# Altium PCB 海关全向控制器主控板电路V2.PcbDoc (part 1 of 3)
Units mil, origin at the board's own origin, x right, y up, seen from the top; angles counter-clockwise.
Board outline 7874.02 x 2362.2 mil, 2 copper layers (Top Layer, Bottom Layer), stack 42.17 mil thick; 192 components, 121 nets, 551 pads, 141 vias.
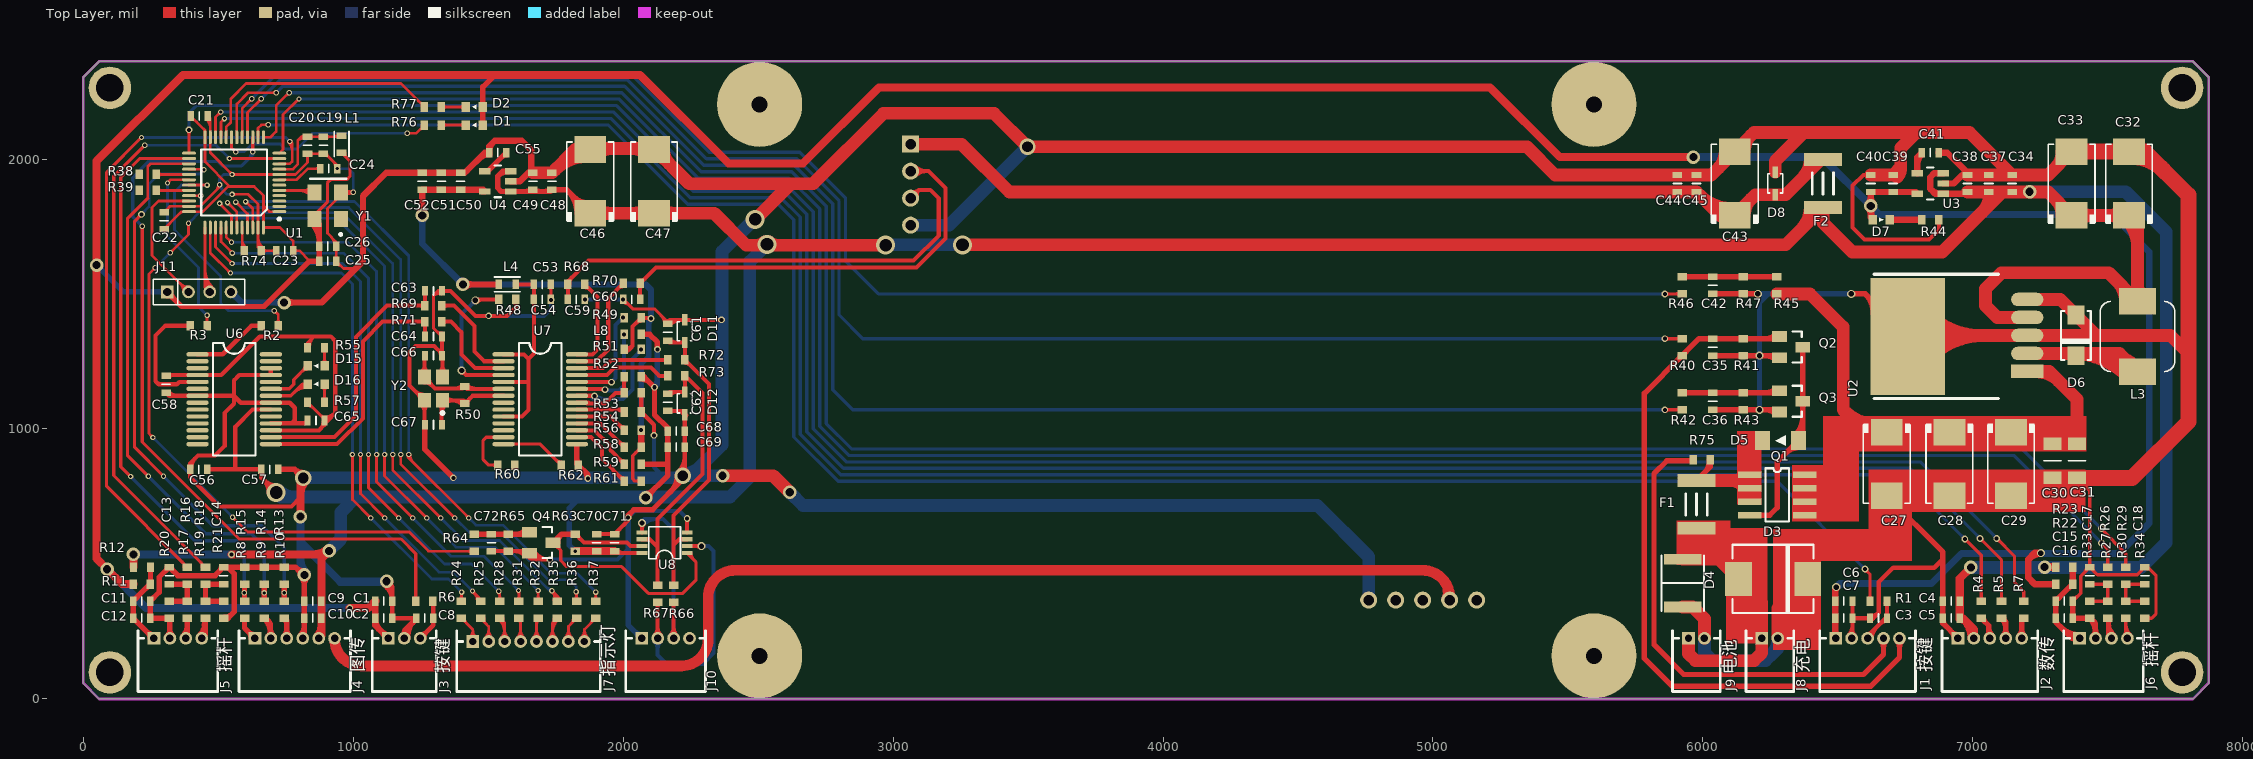
[diagram p0: Top Layer view]
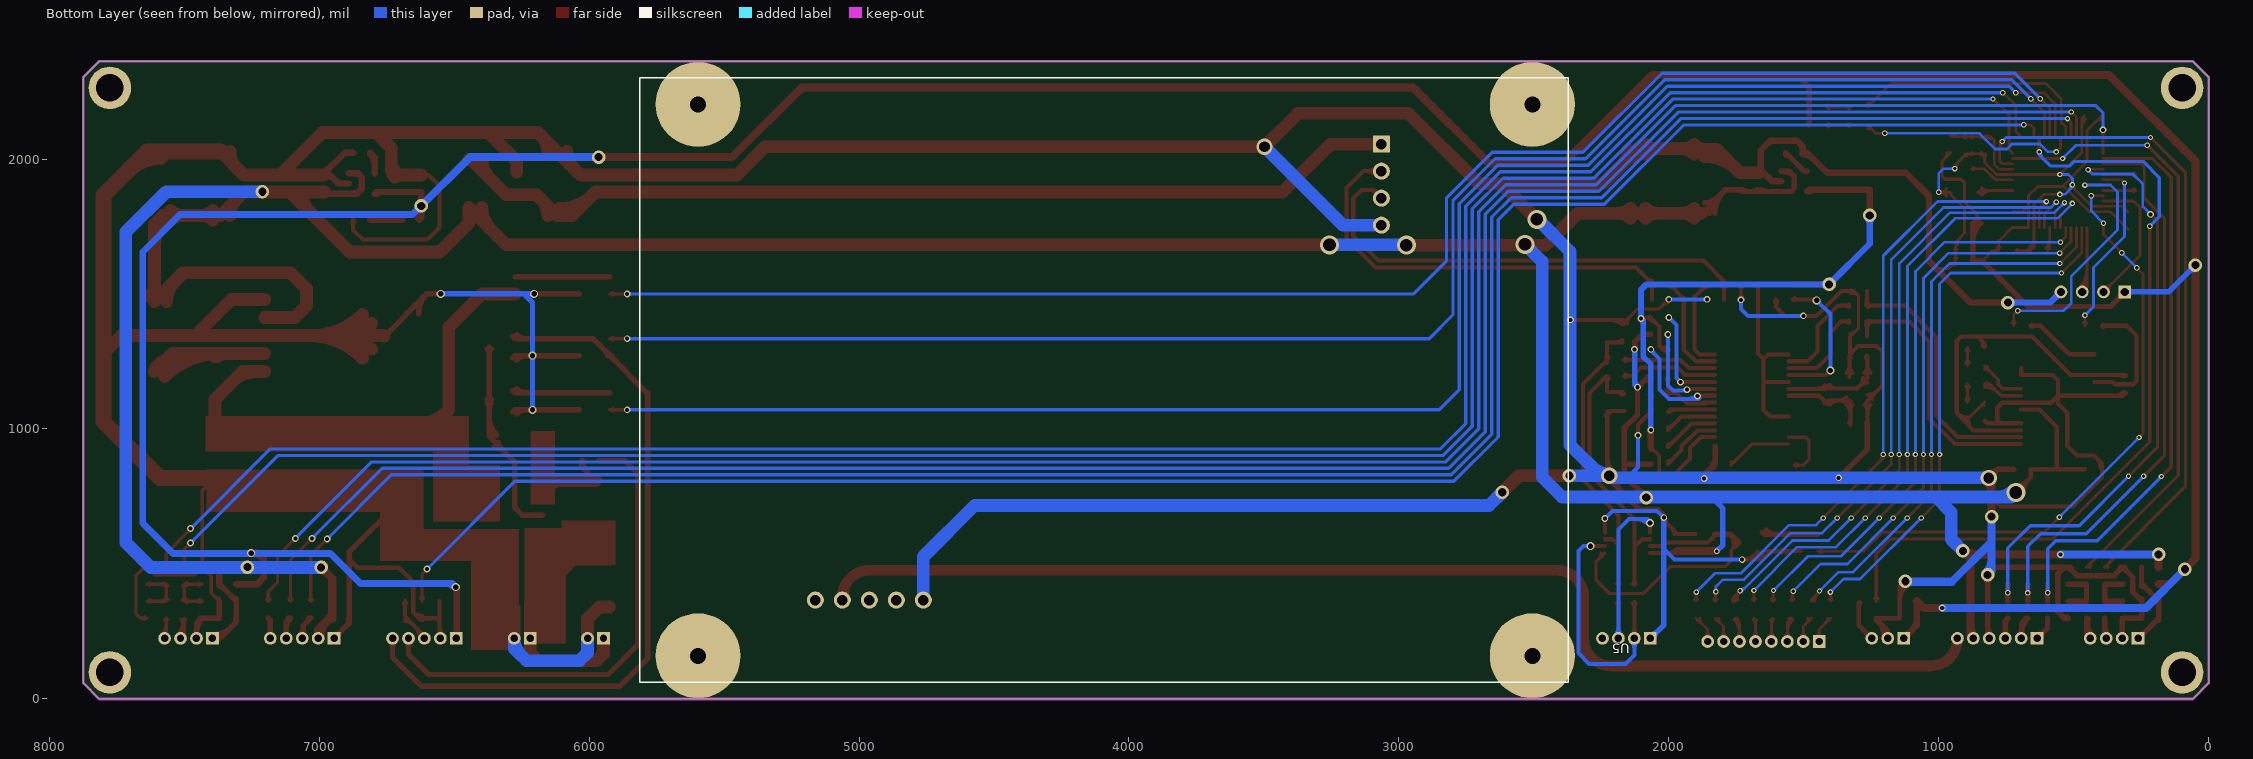
[diagram p1: Bottom Layer view, seen from below]
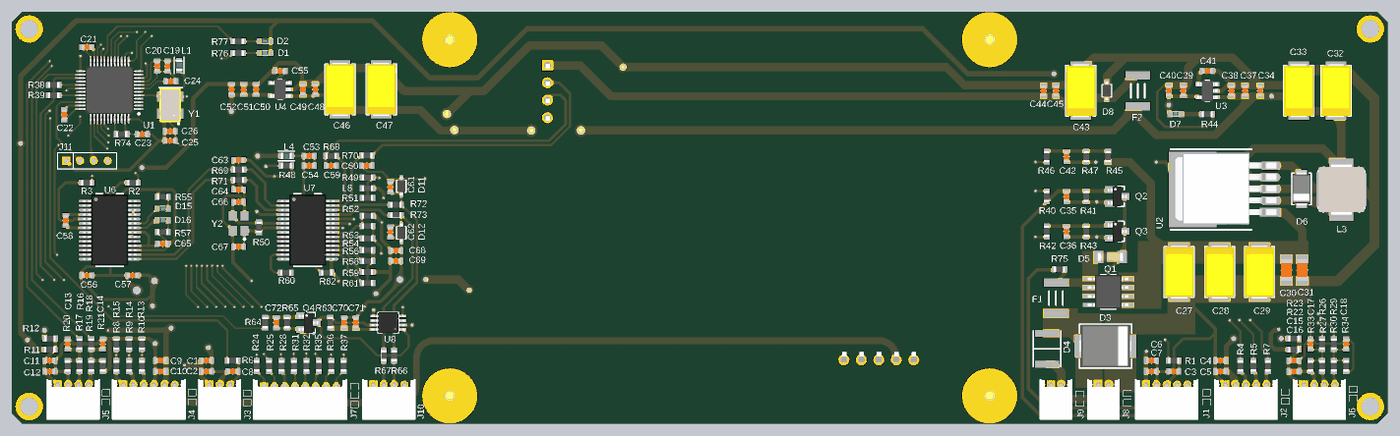
[diagram p4: 3D render of the assembled board from above, using the file's embedded part models]

## Layer stack, top to bottom
Top Solder: solder mask 0.4, Solder Resist, Dk 3.5
Top Layer: signal copper 1.4
Dielectric 1: dielectric 39.3701, FR-4, Dk 4.8
Bottom Layer: signal copper 1.4
Bottom Solder: solder mask 0.4, Solder Resist, Dk 3.5

## Board outline
0,59.06 0,2303.15 59.06,2362.2 7814.96,2362.2 7874.02,2303.15 7874.02,59.06 7814.96,0 59.06,0

## Design rules (kind name [scope] priority, off if disabled: settings)
Clearance [All] p1: gap=6
ComponentClearance [All] p1: gap=0 collisioncheckmode=3 verticalgap=0 showdistances=FALSE
DiffPairsRouting [All] p1: maxlimit=10 minlimit=10 mostfreqgap=10 toplayer_minwidth=15 toplayer_maxwidth=15 toplayer_prefwidth=15 bottomlayer_minwidth=15 bottomlayer_maxwidth=15 bottomlayer_prefwidth=15 maxuncoupledlength=500
Height [All] p1: minheight=0 maxheight=2000 prefheight=500
HoleSize [All] p1: absolutevalues=TRUE maxlimit=200 minlimit=1 maxpercent=80.000 minpercent=20.000
HoleToHoleClearance [All] p1: gap=6 allowstackedmicrovias=TRUE
MatchedLengths [InNetClass(USB)] p1: tolerance=1000 checknetsindiffpair=TRUE checkdiffpairvsdiffpair=TRUE checkothers=TRUE
MinimumSolderMaskSliver [All] p1: minsoldermaskwidth=0
PlaneConnect [All] p1: planeconnectstyle=Direct reliefexpansion=20 reliefentries=4 reliefconductorwidth=10 reliefairgap=10
PolygonConnect [All] p1: connectstyle=Direct reliefconductorwidth=10 reliefentries=4 polygonreliefangle="90 Angle" airgapwidth=10
RoutingVias [All] p1: holewidth=28 width=50 viastyle="Through Hole" minholewidth=8 minwidth=12 maxholewidth=200 maxwidth=300
SilkToSilkClearance [All] p1: silktosilkclearance=0
SilkToSolderMaskClearance [IsPad] p1: minsilkscreentomaskgap=0 clearancetoexposedcopper=TRUE
SolderMaskExpansion [All] p1: expansion=4
Width [All] p1: maxlimit=157.48 minlimit=10 preferedwidth=10
20 further rules are at their usual default settings.

## Classes and differential pairs
component class Designator: C43 C44 C45 C46 C47 C48 C49 C50 C51 C52 C53 C54 C55 C56 C57 C58 C59 C60 C61 C62 C63 C64 C65 C66 C67 C68 C69 C70 C71 C72 D8 D11 D12 D15 D16 F2 J10 L4 L8 Q4 R48 R49 R50 R51 R52 R53 R54 R55 R56 R57 R58 R59 R60 R61 R62 R63 R64 R65 R66 R67 R68 R69 R70 R71 R72 R73 U4 U5 U6 U7 U8 Y2
component class 海关全向控制器主控板电路V2_系统管理: C1 C2 C3 C4 C5 C6 C7 C8 C9 C10 C11 C12 C13 C14 C15 C16 C17 C18 J1 J2 J3 J4 J5 J6 J7 R1 R2 R3 R4 R5 R6 R7 R8 R9 R10 R11 R12 R13 R14 R15 R16 R17 R18 R19 R20 R21 R22 R23 R24 R25 R26 R27 R28 R29 R30 R31 R32 R33 R34 R35 R36 R37
differential pair USB: +USB_P -USB_N
differential pair SLAVE2: +SLAVE2_P -SLAVE2_N
differential pair HOST: +HOST_P -HOST_N
differential pair SLAVE1: +SLAVE1_P -SLAVE1_N

## Components (designator, comment, footprint, x,y, rotation, side; value= is the part's Value field where it differs from the comment)
C1 "10uF" C0603 1113.17,362.2 r0 top
C2 "0.1uF" C0603 1113.17,299.21 r0 top
C3 "0.1uF" C0603 6650.61,299.21 r180 top
C4 "10uF" C0603 6920.26,362.2 r180 top
C5 "0.1uF" C0603 6920.26,299.21 r180 top
C6 "10uF" C0603 6522.62,362.2 r0 top
C7 "0.1uF" C0603 6522.62,299.21 r0 top
C8 "0.1uF" C0603 1264.78,299.21 r180 top
C9 "10uF" C0603 850.39,362.2 r180 top
C10 "0.1uF" C0603 850.39,299.21 r180 top
C11 "0.1uF" C0603 216.54,362.2 r180 top
C12 "10uF" C0603 216.54,299.21 r180 top
C13 "0.1uF" C0603 318.9,456.69 r90 top
C14 "0.1uF" C0603 519.68,456.69 r90 top
C15 "0.1uF" C0603 7338.58,362.2 r180 top
C16 "10uF" C0603 7338.58,299.21 r180 top
C17 "0.1uF" C0603 7433.07,456.69 r90 top
C18 "0.1uF" C0603 7637.8,456.69 r90 top
C19 "10uF" C0603 889.76,2051.18 r90 top
C20 "0.1uF" C0603 830.71,2051.18 r270 top
C21 "0.1uF" C0603 429.13,2159.45 r0 top
C22 "0.1uF" C0603 299.21,1771.65 r90 top
C23 "0.1uF" C0603 746.06,1660.43 r180 top
C24 "0.1uF" C0603 909.45,1964.57 r0 top
C25 "10uF" C0603 905.51,1622.05 r180 top
C26 "10uF" C0603 905.51,1677.17 r180 top
C27 "100uF/25V" C7343 6681.07,870.07 r270 top
C28 "100uF/25V" C7343 6913.36,870.07 r270 top
C29 "100uF/25V" C7343 7141.7,870.07 r270 top
C30 "22uF" C1206 7295.28,881.89 r270 top
C31 "0.1uF" C1206 7385.83,881.89 r270 top
C32 "100uF/25V" C7343 7578.74,1909.45 r90 top
C33 "100uF/25V" C7343 7366.14,1909.45 r90 top
C34 "0.1uF" C0603 7145.67,1909.45 r270 top
C35 "0.1uF" C0603 6036.42,1303.15 r90 top
C36 "0.1uF" C0603 6036.42,1102.36 r90 top
C37 "10uF" C0603 7059.06,1909.45 r90 top
C38 "0.1uF" C0603 6980.31,1909.45 r270 top
C39 "10uF" C0603 6704.72,1909.45 r90 top
C40 "0.1uF" C0603 6622.05,1909.45 r270 top
C41 "470uF" C0603 6842.52,2023.62 r180 top
C42 "0.1uF" C0603 6036.42,1531.82 r90 top
C43 "100uF/25V" C7343 6118.11,1909.45 r90 top
C44 "10uF" C0603 5905.51,1909.45 r90 top
C45 "0.1uF" C0603 5976.38,1909.45 r270 top
C46 "100uF/25V" C7343 1877.95,1917.32 r90 top
C47 "100uF/25V" C7343 2114.17,1917.32 r90 top
C48 "10uF" C0603 1736.22,1917.32 r90 top
C49 "0.1uF" C0603 1665.35,1917.32 r270 top
C50 "10uF" C0603 1397.64,1917.32 r90 top
C51 "0.1uF" C0603 1326.77,1917.32 r270 top
C52 "0.1uF" C0603 1255.91,1917.32 r270 top
C53 "0.1uF" C0603 1700.79,1535.43 r180 top
C54 "0.1uF" C0603 1700.79,1480.32 r180 top
C55 "470uF" C0603 1535.43,2023.62 r0 top
C56 "10uF" C0603 427.17,850.39 r180 top
C57 "0.1uF" C0603 690.94,850.39 r180 top
C58 "0.1uF" C0603 307.09,1165.35 r90 top
C59 "10pF" C0603 1826.77,1480.32 r0 top
C60 "10pF" C0603 2031.5,1480.31 r180 top
C61 "10pF" C0603 2165.35,1358.27 r90 top
C62 "10pF" C0603 2165.35,1098.43 r270 top
C63 "10pF" C0603 1297.24,1511.81 r0 top
C64 "10pF" C0603 1297.24,1342.52 r0 top
C65 "0.1uF" C0603 862.2,1031.5 r180 top
C66 "20pF" C0603 1297.24,1271.65 r0 top
C67 "20pF" C0603 1297.24,1015.75 r180 top
C68 "10uF" C0603 2196.85,992.13 r0 top
C69 "0.1uF" C0603 2196.85,933.07 r180 top
C70 "10uF" C0603 1901.57,578.73 r90 top
C71 "0.1uF" C0603 1968.5,578.73 r270 top
C72 "0.1uF" C0603 1511.81,578.73 r90 top
D1 "LED" LED0603 1448.82,2125.98 r180 top
D2 "LED" LED0603 1448.82,2192.91 r180 top
D3 "3.0SMCJC15A" smc 6259.84,444.88 r0 top
D4 "BA301N" BA301N 5925.2,429.13 r270 top
D5 "ZMM16" SOD-80-S 6287.4,956.69 r180 top
D6 "SS14" SMA 7381.89,1346.46 r270 top
D7 "LED" LED0603 6661.42,1775.59 r0 top
D8 "BV05C" SOD323 6267.72,1909.45 r90 top
D11 "BV05C" SOD323 2228.35,1362.2 r270 top
D12 "BV05C" SOD323 2228.35,1094.49 r90 top
D15 "LED" LED0603 862.2,1233.71 r180 top
D16 "LED" LED0603 862.2,1166.31 r180 top
F1 "5A不可恢复保险" F1218 5976.38,720.47 r90 top
F2 "2A" F1218 6444.88,1909.45 r90 top
J1 "Jack 1x5" ZH-5AWD 6610.24,224.41 r0 top
J2 "Jack 1x5" ZH-5AWD 7062.99,224.41 r0 top
J3 "Jack 1x3" ZH-3AWD 1188.98,224.41 r0 top
J4 "Jack 1x6" ZH-6AWD 783.46,224.41 r0 top
J5 "Jack 1x4" ZH-4AWD 350.39,224.41 r0 top
J6 "Jack 1x4" ZH-4AWD 7484.25,224.41 r0 top
J7 "Jack 1x8" ZH-8AWD 1649.61,212.6 r0 top
J8 "Jack 1x2" ZH-2AWD 6248.03,224.41 r0 top
J9 "Jack 1x2" ZH-2AWD 5976.38,224.41 r0 top
J10 "Jack 1x4" ZH-4AWD 2157.48,224.41 r0 top
J11 "Jack 1x4" Jk1*4-2.0 429.13,1507.87 r0 top (schematic designator 1)
L1 "1uH" L0603 956.69,2055.12 r90 top
L3 "33uH" L6.6*7.1mm 7610.24,1342.52 r90 top
L4 "10uH" L0603 1570.87,1535.43 r0 top
L8 "FBMA-10-160808-121T" R0603 2035.43,1350.39 r0 top
Q1 "FDS4435" SO8 6275.59,755.91 r0 top
Q2 "S8050" SOT-23 6326.77,1303.15 r270 top
Q3 "S8050" SOT-23 6326.77,1102.36 r270 top
Q4 "S8050" SOT-23 1696.85,578.73 r270 top
R1 "1K" R0603 6650.61,362.2 r0 top
R2 "0R" R0603 690.94,1381.89 r180 top
R3 "0R" R0603 427.17,1381.89 r180 top
R4 "0R" R0603 7031.5,330.71 r90 top
R5 "0R" R0603 7106.3,330.71 r90 top
R6 "1K" R0603 1262.81,362.2 r0 top
R7 "0R" R0603 7188.98,330.71 r90 top
R8 "1K" R0603 597.42,330.71 r90 top
R9 "1K" R0603 670.76,330.71 r90 top
R10 "1K" R0603 744.09,330.71 r90 top
R11 "0R" R0603 216.54,425.2 r0 top
R12 "NC" R0603 217.5,488.19 r0 top
R13 "10K" R0603 744.09,456.69 r270 top
R14 "10K" R0603 670.76,456.69 r270 top
R15 "10K" R0603 597.42,456.69 r270 top
R16 "1K" R0603 385.83,456.69 r90 top
R17 "1K" R0603 385.83,330.71 r270 top
R18 "1K" R0603 452.76,456.69 r90 top
R19 "1K" R0603 452.76,330.71 r270 top
R20 "NC" R0603 318.9,330.71 r270 top
R21 "NC" R0603 519.68,330.71 r90 top
R22 "0R" R0603 7338.58,425.2 r0 top
R23 "NC" R0603 7338.58,488.19 r0 top
R24 "1K" R0603 1400.57,330.71 r90 top
R25 "0R" R0603 1471.73,330.71 r90 top
R26 "1K" R0603 7500,456.69 r90 top
R27 "1K" R0603 7500,330.71 r270 top
R28 "1K" R0603 1542.88,330.71 r90 top
R29 "1K" R0603 7566.93,456.69 r90 top
R30 "1K" R0603 7566.93,330.71 r270 top
R31 "0R" R0603 1614.03,330.71 r90 top
R32 "1K" R0603 1685.18,330.71 r90 top
R33 "NC" R0603 7433.07,330.71 r270 top
R34 "NC" R0603 7637.8,330.71 r90 top
R35 "0R" R0603 1756.33,330.71 r90 top
R36 "1K" R0603 1827.49,330.71 r90 top
R37 "0R" R0603 1898.64,330.71 r90 top
R38 "NC" R0603 239.17,1942.91 r0 top
R39 "NC" R0603 239.17,1883.86 r0 top
R40 "1K" R0603 5923.23,1303.15 r270 top
R41 "10K" R0603 6149.61,1303.15 r270 top
R42 "1K" R0603 5923.23,1102.36 r90 top
R43 "10K" R0603 6149.61,1102.36 r270 top
R44 "1K" R0603 6842.52,1775.59 r180 top
R45 "10K" R0603 6273.62,1531.82 r90 top
R46 "1K" R0603 5923.23,1531.82 r90 top
R47 "1K" R0603 6149.61,1531.82 r90 top
R48 "680R" R0603 1570.87,1480.32 r0 top
R49 "0R" R0603 2035.43,1411.35 r180 top
R50 "1M(N.C.)" R0603 1413.39,1125.98 r90 top
R51 "NC" R0603 2035.43,1295.28 r0 top
R52 "30K" R0603 2035.43,1192.91 r180 top
R53 "30K" R0603 2035.43,1133.86 r180 top
R54 "1M(N.C.)" R0603 2035.43,1062.99 r180 top
R55 "1K" R0603 862.2,1301.12 r0 top
R56 "100K" R0603 2035.43,996.06 r180 top
R57 "1K" R0603 862.2,1098.9 r0 top
R58 "100K" R0603 2035.43,933.07 r180 top
R59 "10K" R0603 2035.43,870.08 r180 top
R60 "10K" R0603 1566.93,866.14 r0 top
R61 "0R" R0603 2035.43,807.09 r180 top
R62 "NC" R0603 1802.17,866.14 r0 top
R63 "0R" R0603 1822.83,578.73 r90 top
R64 "1K" R0603 1448.82,578.73 r90 top
R65 "10K" R0603 1574.8,578.73 r270 top
R66 "0R" R0603 2187.01,389.76 r90 top
R67 "0R" R0603 2127.95,389.76 r90 top
R68 "0R" R0603 1826.77,1535.43 r0 top
R69 "0R" R0603 1297.24,1456.69 r180 top
R70 "0R" R0603 2031.5,1539.37 r180 top
R71 "0R" R0603 1297.24,1397.64 r180 top
R72 "0R" R0603 2196.85,1255.91 r180 top
R73 "0R" R0603 2196.85,1196.85 r180 top
R74 "100K" R0603 627.95,1660.43 r180 top
R75 "500k" R0603 5996.06,885.83 r0 top
R76 "1K" R0603 1295.28,2125.98 r0 top
R77 "1K" R0603 1295.28,2192.91 r0 top
U1 "STM32F103CB" LQF48 559.06,1913.39 r180 top locked
U2 "LM2596-5" TO-263-5 6980.31,1346.46 r90 top
U3 "MIC5219-3.3YM5" SOT-23-5 6842.52,1909.45 r180 top
U4 "MIC5219-3.3YM5" SOT-23-5 1535.43,1917.32 r180 top
U5 "USB-AV" USB-AV 4051.18,1181.1 r180 bottom locked
U6 "FT232RL" SSOP-28 559.06,1110.24 r0 top
U7 "GL852G" SSOP-28 1692.91,1110.24 r0 top locked
U8 "7WB3125" Micro8 2153.54,578.74 r180 top
Y1 "XTAL 8MHz" XTAL5032 905.51,1826.77 r90 top
Y2 "12M" XTAL3225 1330.71,1106.3 r90 top

## Footprints (in the part's own frame and the unit in brackets; to place one, negate y for a bottom-side part, rotate by r counter-clockwise, add the part's x,y. Pads: shape width x height; smd on the part's side, far side on the other; paste and mask are expansions set on the pad)
BA301N [mm]
  rect 1x3.5 smd: 1(-2.25,0) 2(2.25,0)
  silkscreen extent -2.6,-2 2.6,2
C0603 [mm]
  rect 0.6x0.9 smd: 1(-0.8,0) 2(0.8,0)
  silkscreen extent 0,-0.4 0,0.4, body extent -0.8,-0.4 0.8,0.4, height 0.5
C1206 [mm]
  rect 1.2x1.7 smd: 1(-1.6,0) 2(1.6,0)
  silkscreen extent 0,-0.8 0,0.8, body extent -1.6,-0.8 1.6,0.8, height 1.25
C7343 [mm] "100uF/25V"
  rect 2.5x3 smd: 1(-3,0) 2(3,0)
  silkscreen extent -3.8,-2.2 3.7,2.2, body extent -3.87,-2.15 3.87,2.15, height 2.9
F1218 [mm]
  rect 1.2x3.6 smd: 1(-2.25,0) 2(2.25,0)
  silkscreen extent -1,-1 1,1, body extent -2.25,-1.65 2.25,1.65, height 0.42
Jk1*4-2.0 [mm] "4P，直插，2.0mm间距，排母"
  rect 1.2x1.2 hole 0.762: 1(-3,0)
  round 1.2 hole 0.762: 2(-1,0) 3(1,0) 4(3,0)
  silkscreen extent -4.3,-1.2 4.3,1.2, body extent -4.25,-1.22 4.25,1.18, height 4.3
L6.6*7.1mm [mm] "AMPI0630ED"
  rect 2.5x3.5 smd: 1(-3.3,0) 2(3.3,0)
  silkscreen extent -3.3,-3.5 3.3,3.5, body extent -3.65,-3.35 3.65,3.35, height 3.13
L0603 [mm]
  rect 0.6x0.9 smd: 1(-0.8,0) 2(0.8,0)
  silkscreen extent -1.2,-0.7 1.2,0.7, body extent -0.8,-0.47 0.8,0.48, height 0.8
LED0603 [mm]
  rect 0.8x0.9 smd: 1(-0.8,0) 2(0.8,0)
  silkscreen extent -0.2,-0.2 0.2,0.2, body extent -0.8,-0.4 0.8,0.4, height 0.6
LQF48 [mm]
  oval 1.3x0.28 smd: 1(-4.25,2.75) 2(-4.25,2.25) 3(-4.25,1.75) 4(-4.25,1.25) 5(-4.25,0.75) 6(-4.25,0.25) 7(-4.25,-0.25) 8(-4.25,-0.75) 9(-4.25,-1.25) 10(-4.25,-1.75) 11(-4.25,-2.25) 12(-4.25,-2.75) 25(4.25,-2.75) 26(4.25,-2.25) 27(4.25,-1.75) 28(4.25,-1.25) 29(4.25,-0.75) 30(4.25,-0.25) 31(4.25,0.25) 32(4.25,0.75) 33(4.25,1.25) 34(4.25,1.75) 35(4.25,2.25) 36(4.25,2.75)
  oval 0.28x1.3 smd: 13(-2.75,-4.25) 14(-2.25,-4.25) 15(-1.75,-4.25) 16(-1.25,-4.25) 17(-0.75,-4.25) 18(-0.25,-4.25) 19(0.25,-4.25) 20(0.75,-4.25) 21(1.25,-4.25) 22(1.75,-4.25) 23(2.25,-4.25) 24(2.75,-4.25) 37(2.75,4.25) 38(2.25,4.25) 39(1.75,4.25) 40(1.25,4.25) 41(0.75,4.25) 42(0.25,4.25) 43(-0.25,4.25) 44(-0.75,4.25) 45(-1.25,4.25) 46(-1.75,4.25) 47(-2.25,4.25) 48(-2.75,4.25)
  silkscreen extent -4.38,-3.1 3.1,3.57, body extent -4.49,-4.5 4.51,4.5, height 1.8
Micro8 [mm]
  rect 1x0.38 smd: 1(-2.12,0.975) 2(-2.12,0.325) 3(-2.12,-0.325) 4(-2.12,-0.975) 5(2.12,-0.975) 6(2.12,-0.325) 7(2.12,0.325) 8(2.12,0.975)
  silkscreen extent -1.5,-1.5 1.5,1.5, body extent -2.45,-1.5 2.45,1.5, height 1.15
R0603 [mm]
  rect 0.7x0.9 smd: 1(-0.8,0) 2(0.8,0)
  body extent -0.8,-0.4 0.8,0.4, height 0.37
SMA [mm]
  rect 1.75x1.6 smd: 1(-1.925,0) 2(1.925,0)
  silkscreen extent -2.3,-1.5 2.3,1.5, body extent -2.6,-1.33 2.6,1.33, height 2.15
smc [mm]
  rect 2.5x3.2 smd: 1(-3.25,0) 2(3.25,0)
  silkscreen extent -3.8,-3.2 3.8,3.2, body extent -3.8,-3.1 3.8,3.12, height 2.8
SO8 [mm]
  rect 2.2x0.6 smd: 1(-2.6,1.905) 2(-2.6,0.635) 3(-2.6,-0.635) 4(-2.6,-1.905) 5(2.6,-1.905) 6(2.6,-0.635) 7(2.6,0.635) 8(2.6,1.905)
  silkscreen extent -1.1,-2.5 1.1,2.5, body extent -2.97,-2.46 2.97,2.44, height 1.4
SOD323 [mm]
  rect 1.06x0.54 smd: 1(-1.07,0) 2(1.07,0)
  silkscreen extent -0.9,-0.7 0.9,0.7, body extent -1.35,-0.62 1.35,0.63, height 1.1
SOD-80-S [mm]
  rect 1.4x1.8 smd: 1(-1.7,0) 2(1.7,0)
  silkscreen extent -0.5,-0.5 0.5,0.5, body extent -1.85,-0.79 1.85,0.81, height 1.6
SOT-23 [mm]
  rect 1x1.4 smd: 1(-1,-1.1) 2(1,-1.1) 3(0,1.1)
  silkscreen extent -1.47,0.13 1.45,1, body extent -1.45,-1.4 1.45,1.4, height 1.3
SOT-23-5 [mm]
  rect 1.05x0.6 smd: 1(-1.225,0.95) 2(-1.225,0) 3(-1.225,-0.95) 4(1.225,-0.95) 5(1.225,0.95)
  silkscreen extent -0.3,-1.5 0.3,1.5, body extent -1.5,-1.5 1.5,1.5, height 1.2
SSOP-28 [mm]
  oval 2.1x0.4 smd: 1(-3.45,4.225) 2(-3.45,3.575) 3(-3.45,2.925) 4(-3.45,2.275) 5(-3.45,1.625) 6(-3.45,0.975) 7(-3.45,0.325) 8(-3.45,-0.325) 9(-3.45,-0.975) 10(-3.45,-1.625) 11(-3.45,-2.275) 12(-3.45,-2.925) 13(-3.45,-3.575) 14(-3.45,-4.225) 15(3.45,-4.225) 16(3.45,-3.575) 17(3.45,-2.925) 18(3.45,-2.275) 19(3.45,-1.625) 20(3.45,-0.975) 21(3.45,-0.325) 22(3.45,0.325) 23(3.45,0.975) 24(3.45,1.625) 25(3.45,2.275) 26(3.45,2.925) 27(3.45,3.575) 28(3.45,4.225)
  silkscreen extent -2,-5.3 2,5.3, body extent -3.88,-5.16 3.88,5.17, height 2.15
TO-263-5 [mil]
  rect 433.07x275.59 smd: 0(-3.33,221.44)
  rect 50x120 smd: 1(-133.33,-221.44)
  oval 50x120 smd: 2(-66.67,-221.44) 3(0,-221.44) 4(66.67,-221.44) 5(133.33,-221.44)
  silkscreen extent -233,-114 227,346, body extent -204,-258 207,321, height 177
USB-AV [mm]
  rect 1.6x1.6 hole 1: 1(25.05,22.2)
  round 1.6 hole 1: 2(25.05,19.66) 3(25.05,17.12) 4(25.05,14.58) 5(-18.054,-20.701) 6(-20.594,-20.701) 7(-23.134,-20.701) 8(-25.674,-20.701) 9(-28.214,-20.701)
  round 8 hole 1.5: ""(-39.25,-25.95) ""(-39.25,25.95) ""(39.25,-25.95) ""(39.25,25.95)
  silkscreen extent -44.75,-28.45 42.65,28.45, body extent -44.83,-28.37 42.57,28.53, height 5
XTAL3225 [mm]
  rect 1.4x1.2 smd: 1(0,0) 2(2.2,0) 3(2.2,1.7) 4(0,1.7)
  silkscreen extent -1.34,-0.14 -1.06,0.14
XTAL5032 [mm]
  rect 1.5x1.3 smd: 1(-1.25,-1.25) 2(1.25,-1.25) 3(1.25,1.25) 4(-1.25,1.25)
  silkscreen extent -2.83,-1.78 2.54,1.65, body extent -2.5,-1.6 2.5,1.6, height 1.2
ZH-2AWD [mm] "1.5mm，2P，卧插"
  rect 1.2x1.2 hole 0.7: 1(-0.75,0)
  round 1.2 hole 0.7: 2(0.75,0)
  silkscreen extent -2.25,-5 2.25,0.7, body extent -2.25,-5.05 2.25,0.65, height 3.95
ZH-3AWD [mm] "1.5mm，3P，卧插"
  rect 1.2x1.2 hole 0.7: 1(-1.5,0)
  round 1.2 hole 0.7: 2(0,0) 3(1.5,0)
  silkscreen extent -3,-5 3,0.7, body extent -3,-5.05 3,0.65, height 3.95
ZH-4AWD [mm] "1.5mm，4P，卧插"
  rect 1.2x1.2 hole 0.7: 1(-2.25,0)
  round 1.2 hole 0.7: 2(-0.75,0) 3(0.75,0) 4(2.25,0)
  silkscreen extent -3.75,-5 3.75,0.7, body extent -3.75,-5.05 3.75,0.65, height 3.95
ZH-5AWD [mm] "1.5mm，5P，卧插"
  rect 1.2x1.2 hole 0.7: 1(-3,0)
  round 1.2 hole 0.7: 2(-1.5,0) 3(0,0) 4(1.5,0) 5(3,0)
  silkscreen extent -4.5,-5 4.5,0.7, body extent -4.5,-5.05 4.5,0.65, height 3.95
ZH-6AWD [mm] "1.5mm，6P，卧插"
  rect 1.2x1.2 hole 0.7: 1(-3.75,0)
  round 1.2 hole 0.7: 2(-2.25,0) 3(-0.75,0) 4(0.75,0) 5(2.25,0) 6(3.75,0)
  silkscreen extent -5.25,-5 5.25,0.7, body extent -5.25,-5.05 5.25,0.65, height 3.95
ZH-8AWD [mm] "1.5mm，8P，卧插"
  rect 1.2x1.2 hole 0.7: 1(-5.25,0)
  round 1.2 hole 0.7: 2(-3.75,0) 3(-2.25,0) 4(-0.75,0) 5(0.75,0) 6(2.25,0) 7(3.75,0) 8(5.25,0)
  silkscreen extent -6.75,-4.7 6.75,1, body extent -6.75,-4.75 6.75,0.95, height 3.95

## Part data
C1 C2 C3 C4 C5 C6 C7 C8 C9 C10 C11 C12 C13 C14 C15 C16 C17 C18 C19 C20 C21 C22 C23 C24 C25 C26 C58: library part Cap, "Capacitor"
C27 C28 C29 C43 C46 C47: library part "Cap Poll"
C30 C31 C34 C35 C36 C37 C38 C39 C40 C42 C44 C48 C50 C56 C68 C70 C72: library part CAP, "CAP"
C32 C33: library part ELECTRO, "Electrolytic Capacitor"
C41 C45 C49 C51 C52 C53 C54 C55 C57 C59 C60 C61 C62 C63 C64 C65 C66 C67 C69 C71: library part "Cap Semi"
D3 D8 D11 D12: library part Diode-TVS
D5: library part DIODE-ZENER, "Small Signal Zener Diodes"
D6: library part Diode-Switch, "Silicon Epitaxial Planar Diodes"
F1 F2: library part Fuse2
J1 J2 J3 J4 J5 J6 J7 J8 J9 J10 J11: "插座"
L1 L3: library part INDUCTOR, "INDUCTOR"
L4: library part Inductor
L8 R48 R49 R50 R51 R52 R53 R54 R56 R58 R59 R60 R61 R62 R68 R69 R70 R71 R72 R73: library part Res
Q2 Q3 Q4: library part NPN, "NPN General Purpose Amplifier"
R1 R2 R3 R4 R5 R6 R7 R8 R9 R10 R11 R12 R13 R14 R15 R16 R17 R18 R19 R20 R21 R22 R23 R24 R25 R26 R27 R28 R29 R30 R31 R32 R33 R34 R35 R36 R37 R39 R40 R41 R42 R43 R44 R45 R46 R47 R55 R57 R63 R64 R65 R66 R67 R75 R76 R77: library part Res, "Resistor"
R38 R74: library part RES, "Resistor"
U1: library part STM32F103Cx
U2: library part LM25x6-5, "LM2596-5;LM2576-5"
U3 U4: library part MIC5205
U7: library part GL850G, "USB 2.0 Low-Power HUB Controller"
Y1: library part XTAL
Y2: library part XTAL3225

## Free pads (board coordinates)
  round 157.48 hole 102.36: ""(98.43,98.43) ""(98.43,2263.78) ""(7775.59,98.43) ""(7775.59,2263.78)

## Via types
v1: diameter 20, hole 12, Top Layer to Bottom Layer, tented both sides, 71 vias
v2: diameter 25, hole 15, Top Layer to Bottom Layer, tented both sides, 34 vias
v3: diameter 50, hole 30, Top Layer to Bottom Layer, tented both sides, 18 vias
v4: diameter 30, hole 20, Top Layer to Bottom Layer, tented both sides, 10 vias
v5: diameter 70.87, hole 47.24, Top Layer to Bottom Layer, tented both sides, 5 vias
v6: diameter 60, hole 40, Top Layer to Bottom Layer, tented both sides, 3 vias

## Nets (pads, with @x,y where several pads share a name; then routed paths per layer and width w, separated by ;. In a path a pad name is that pad's centre, name@x,y a point inside that pad or via, vN(x,y) a via of type N, cw(c..) or ccw(c..) an arc to the next point about the centre after c; other vN are vias at no path point)
3V3: C50.1 C51.2 C52.2 L4.1 R49.1 R51.1 R56.1 R58.1 R61.1 U4.5 | length 2920.3
  Top Layer w12: 2046.93,913.07 cw(c2066.93,893.07) R58.1@2066.93,921.35 ; R61.1@2061.43,801.59 ccw(c2048.15,788.31) 2048.15,807.09 ccw(c2048.15,825.87) R61.1@2061.43,812.59 ; R61.1@2066.93,807.09 2043.31,807.09 2035.43,814.96 2035.43,901.58 R58.1@2066.93,933.07
  Top Layer w15: R51.1@1999.05,1291.99 ccw(c2009.46,1307.37) 2022.59,1294.24 ; R51.1@2003.94,1295.28 2023.62,1295.28 2035.43,1307.09 ; R51.1@2007.46,1304.41 ccw(c2019.83,1322.69) 2035.43,1307.09 ; R51.1@2008.38,1290.84 cw(c2019.1,1280.12) 2019.1,1295.28 cw(c2019.1,1310.44) R51.1@2008.38,1299.72 ; 2049.49,1393.91 cw(c2066.93,1376.47) R49.1@2066.93,1401.14 ; R49.1@2071.37,1406.91 cw(c2082.09,1396.19) 2082.09,1411.35 cw(c2082.09,1426.51) R49.1@2071.37,1415.79 ; 2086.67,1411.35 cw(c2086.67,1392.78) v2@2099.81,1405.91 ; v2(2103.35,1409.45) 2101.44,1411.35 R49.1@2066.93,1411.35 2035.43,1379.86 2035.43,1307.09
  Top Layer w23.62: v3@1246.58,1800.66 ccw(c1224.06,1823.18) 1255.91,1823.18 ccw(c1287.75,1823.18) v3@1265.23,1800.66 ; v3(1255.91,1791.34) C52.2@1255.91,1885.83 C50.1@1397.64,1885.83 1481.3,1885.83 U4.5@1487.2,1879.92 ; v3(1406.5,1535.43) L4.1@1539.37,1535.43 ; v3@1415.82,1526.11 cw(c1438.34,1503.59) 1438.34,1535.43 cw(c1438.34,1567.27) v3@1415.82,1544.76 ; 1464.09,1885.83 cw(c1464.09,1865.66) U4.5@1478.35,1879.92 ; R58.1@2066.93,933.07 v2(2066.93,996.06)
  Bottom Layer w20: v2(2066.93,996.06) 2066.93,1240.16 2095.43,1268.66 2095.43,1401.53 v2(2103.35,1409.45) ; 2095.43,1384.3 cw(c2128.5,1384.3) v2@2105.11,1407.68
  Bottom Layer w23.62: v3@1246.58,1782.01 cw(c1224.06,1759.5) 1255.91,1759.5 cw(c1287.75,1759.5) v3@1265.23,1782.01 ; v3(1255.91,1791.34) 1255.91,1686.02 v3(1406.5,1535.43) 2083.66,1535.43 2103.35,1515.75 v2(2103.35,1409.45) ; v3@1393.31,1535.43 ccw(c1361.47,1535.43) 1383.98,1557.95 ccw(c1406.5,1580.46) v3@1406.5,1548.62 ; v3@1415.82,1526.11 cw(c1438.34,1503.59) 1438.34,1535.43 cw(c1438.34,1567.27) v3@1415.82,1544.76
3V3_OUT: C58.2 C65.1 R55.1 R57.1 U6.4 U6.17 | length 1585
  Top Layer w12: R55.1@826.49,1305.06 cw(c849.72,1305.06) 833.29,1321.48 ; R55.1@826.66,1311.7 ccw(c822.28,1318.9) 830.71,1318.9 ; R57.1@830.71,1087.19 cw(c830.71,1058.9) 850.71,1078.9 ; R57.1@830.71,1098.9 893.7,1035.91 C65.1@893.7,1031.5 ; R55.1@830.71,1301.12 830.71,1318.9 ; R55.1@834.75,1311.7 cw(c839.13,1318.9) 830.71,1318.9 ; R55.1@838.49,1305.06 cw(c890.69,1305.06) 853.78,1341.97 ; 854.33,1342.52 830.71,1318.9 ; 881.23,1048.38 ccw(c893.7,1060.84) C65.1@893.7,1043.21
  Top Layer w15: U6.17@694.88,995.08 873.03,995.08 893.7,1015.75 C65.1@893.7,1031.5 ; 879.38,1001.43 ccw(c855.22,1025.59) C65.1@889.39,1025.59
  Top Layer w16: C58.2@307.09,1196.85 310.04,1199.8 U6.4@423.23,1199.8 510.83,1199.8 653.54,1342.52 854.33,1342.52 917.32,1342.52 933.07,1326.77 933.07,1059.06 905.51,1031.5 C65.1@893.7,1031.5 ; C58.2@315.69,1194.16 cw(c329.32,1180.52) 329.32,1199.8 ; C65.1@893.7,1025.21 ccw(c893.7,1038.56) C65.1@903.14,1029.12 ; C65.1@893.7,1041.21 ccw(c893.7,1093.18) 930.45,1056.43
+3.3V: C1.1 C2.1 C6.1 C7.1 C21.1 C22.1 C23.1 C25.2 C26.2 C39.1 C40.2 D1.1 D2.1 D7.1 J1.1 J3.1 J11.1 L1.1 R11.1 R22.1 U1.1 U1.24 U1.36 U1.48 U3.5 Y1.4 | length 17832.7
  Top Layer w10: C22.1@299.21,1740.16 364.17,1805.12 U1.36@391.73,1805.12 442.91,1805.12 536.42,1898.62 632.87,1898.62 667.32,1864.17 667.32,1827.76 ; C22.1@311.93,1740.16 cw(c342.63,1740.16) 320.92,1761.87 ; 358.01,1798.96 cw(c371.65,1785.31) U1.36@371.65,1804.61 ; C21.1@397.64,2146.73 cw(c397.64,2116.03) 419.35,2137.74 ; C21.1@397.64,2159.45 450.79,2106.3 U1.24@450.79,2080.71 450.79,1990.16 542.32,1898.62 ; 446.02,2111.07 cw(c435.73,2100.79) U1.24@450.28,2100.79 ; U1.1@726.38,1805.12 689.96,1805.12 667.32,1827.76 ; C23.1@772.74,1671.15 ccw(c761.12,1682.78) 777.56,1682.78 ccw(c794,1682.78) C23.1@782.38,1671.15 ; C23.1@782.38,1655.62 cw(c794,1643.99) 794,1660.43 cw(c794,1676.88) C23.1@782.38,1665.25 ; 838.58,1622.05 800.2,1660.43 C23.1@777.56,1660.43 777.56,1696.85 728.35,1746.06 U1.48@667.32,1746.06 667.32,1827.76
  Top Layer w12: Y1.4@856.3,1777.56 856.3,1792.32 904.53,1840.55 904.53,1911.42 918.31,1925.2 977.36,1925.2 988.19,1936.02 988.19,1992.13 L1.1@956.69,2023.62 ; L1.1@968.41,2023.62 ccw(c996.7,2023.62) 976.69,2003.62
  Top Layer w20: J11.1@299.21,1519.69 J11.1@311.02,1507.87 311.02,1506.89 364.17,1453.74 670.28,1453.74 838.58,1622.05 C25.2@874.02,1622.05 C26.2@874.02,1677.17 874.02,1759.84 Y1.4@856.3,1777.56 ; J11.1@311.02,1494.25 cw(c311.02,1463.74) J11.1@332.6,1485.32 ; J11.1@324.65,1507.87 ccw(c359.91,1507.87) 334.97,1482.94 ; Y1.4@845.27,1762.6 cw(c775.89,1693.21) C26.2@874.02,1693.21 ; Y1.4@859.42,1776.74 cw(c824.17,1741.5) 874.02,1741.5 ; D1.1@1480.32,2125.98 D2.1@1480.32,2192.91 1480.32,2267.72 1524.61,2312.01
  Top Layer w23.62: C2.1@1081.68,293.31 ccw(c1131.54,293.31) 1096.28,258.05 ; C1.1@1081.68,362.2 C2.1@1081.68,299.21 1081.68,272.65 J3.1@1129.92,224.41 ; J3.1@1118.11,224.41 ccw(c1089.6,224.41) 1109.76,244.57 ccw(c1129.92,264.73) J3.1@1129.92,236.22 ; J1.1@6483.77,232.76 ccw(c6466.03,250.51) 6491.13,250.51 ; 6491.13,255.34 ccw(c6523.06,255.34) J1.1@6500.48,232.76 ; 6491.13,399.5 cw(c6508.96,399.5) v4@6496.35,412.12 ; v4@6491.13,409.43 C6.1@6491.13,362.2 C7.1@6491.13,299.21 6491.13,225.41 J1.1@6492.13,224.41 ; v3@6612.72,1817.45 cw(c6590.21,1794.93) 6622.05,1794.93 cw(c6653.89,1794.93) v3@6631.37,1817.45 ; v3@6612.72,1836.1 ccw(c6590.21,1858.61) 6622.05,1858.61 ccw(c6653.89,1858.61) v3@6631.37,1836.1 ; v3@6622.05,1806.07 ccw(c6658.44,1806.07) D7.1@6632.71,1780.34 ; 6624.52,1796.84 cw(c6643.48,1801.92) v3@6630.66,1816.78 ; D7.1@6629.92,1775.59 6622.05,1783.46 v3(6622.05,1826.77) C40.2@6622.05,1877.95 C39.1@6704.72,1877.95 6788.39,1877.95 U3.5@6794.29,1872.05 ; 6771.18,1877.95 cw(c6771.18,1857.79) U3.5@6785.43,1872.05
  Top Layer w25: 7209.06,520.08 cw(c7251.97,477.17) v4@7251.97,537.85 ; v4(7251.97,540.35) 7229.33,540.35 7205.71,516.73 7205.71,448.82 7229.33,425.2 R22.1@7307.09,425.2
  Top Layer w30: R11.1@185.04,425.2 143.7,425.2 v3(88.58,480.31) 49.21,519.68 v3(49.21,1607.28) 49.21,1992.13 369.09,2312.01 1524.61,2312.01 2062.99,2312.01 2390.75,1984.25 2666.34,1984.25 2947.83,2265.75 5211.61,2265.75 5470.47,2006.89 v3(5964.57,2006.89) ; v2(987.2,336.61) 1056.09,336.61 C1.1@1081.68,362.2
  Bottom Layer w20: v3@49.21,1592.28 cw(c49.21,1556.07) 74.82,1581.68 cw(c100.43,1607.28) v3@64.21,1607.28 ; v3(49.21,1607.28) 148.62,1507.87 J11.1@311.02,1507.87 ; J11.1@301.39,1498.24 ccw(c278.14,1474.99) 278.14,1507.87 ccw(c278.14,1540.76) J11.1@301.39,1517.51
  Bottom Layer w25: v4(6494.09,414.37) 6506.89,427.17 6847.44,427.17 6958.66,538.39 7541.34,538.39 7653.54,650.59 7653.54,1656.5 7515.75,1794.29 6654.53,1794.29 v3(6622.05,1826.77) ; v4@6495.86,412.6 cw(c6531.02,377.44) 6531.02,427.17 ; v3@6622.05,1814.27 cw(c6622.05,1784.09) 6643.39,1805.43 cw(c6664.72,1826.77) v3@6634.55,1826.77
  Bottom Layer w30: v3(88.58,480.31) 232.28,336.61 v2(987.2,336.61) ; v3(5964.57,2006.89) 6441.93,2006.89 v3(6622.05,1826.77)
+3.3V_A: C19.2 C20.1 L1.2 U1.9 | length 509.7
  Top Layer w10: U1.9@726.38,1962.6 776.57,1962.6 794.29,1980.31 794.29,2067.91 ; 806.91,2080.53 cw(c820.91,2066.52) C20.1@825.55,2085.78 ; C20.1@819.84,2078.01 ccw(c809.06,2067.88) 809.06,2082.68 ; C20.1@819.84,2087.34 cw(c809.06,2097.48) 809.06,2082.68 ; C20.1@823.21,2076.06 ccw(c816.01,2046.2) 794.29,2067.91 ; C20.1@841.43,2077.86 cw(c853.06,2066.23) 853.06,2082.68 cw(c853.06,2099.12) C20.1@841.43,2087.49 ; C19.2@879.04,2077.86 ccw(c867.41,2066.23) 867.41,2082.68 ccw(c867.41,2099.12) C19.2@879.04,2087.49 ; C19.2@900.49,2077.86 cw(c912.11,2066.23) 912.11,2082.68 cw(c912.11,2099.12) C19.2@900.49,2087.49 ; 924.84,2082.68 ccw(c924.84,2112.56) L1.2@945.97,2091.43 ; L1.2@956.69,2086.61 952.76,2082.68 C19.2@889.76,2082.68 C20.1@830.71,2082.68 809.06,2082.68 ; 794.29,2067.91 809.06,2082.68
+5V: C4.1 C5.1 C9.1 C10.1 C32.1 C33.1 C34.2 C37.1 C38.2 C46.1 C47.1 C48.1 C49.2 C56.1 C57.2 C68.1 C69.2 C70.1 C71.2 F2.1 J2.2 J4.5 L3.2 L8.2 R12.1 R23.1 R52.1 R59.1 R63.1 U2.4 U3.1 U3.3 U4.1 U4.3 U6.20 U8.8 | length 18935.2
  Top Layer w15: C71.2@1968.5,547.23 1975.38,540.35 U8.8@2070.08,540.35 ; C71.2@1977.46,550.28 ccw(c2001.42,574.24) 2001.42,540.35
  Top Layer w16: C56.1@458.66,850.39 C57.2@659.45,850.39 659.45,819.88 v5(714.57,764.76) ; 562.99,854.33 562.99,1007.87 626.97,1071.85 U6.20@694.88,1071.85 ; v5@687.13,764.76 ccw(c620.9,764.76) 667.74,811.59 ccw(c714.57,858.43) v5@714.57,792.2
  Top Layer w20: U4.3@1574.77,1952.91 ccw(c1573.85,1898.59) 1535.43,1937.01 ; U4.3@1583.66,1954.72 1553.15,1954.72 1535.43,1937.01 ; 1640.82,1879.92 ccw(c1640.82,1904.46) C49.2@1658.17,1887.11 ; C49.2@1672.54,1887.11 ccw(c1689.89,1904.46) 1689.89,1879.92 ; 1711.69,1879.92 ccw(c1711.69,1904.46) C48.1@1729.03,1887.11 ; 1794.21,1882.96 cw(c1710.47,1799.21) C46.1@1828.9,1799.21 ; 1817.97,1859.19 ccw(c1868.11,1909.33) C46.1@1868.11,1838.43 ; 1828.35,1848.81 cw(c1778.75,1799.21) C46.1@1848.9,1799.21 ; C46.1@1877.95,1799.21 1791.34,1885.83 C48.1@1736.22,1885.83 1730.32,1879.92 U4.1@1583.66,1879.92 1548.23,1879.92 1535.43,1892.72 1535.43,1937.01 ; R59.1@2066.93,870.08 2158.46,870.08 ; R52.1@2066.93,1185.2 cw(c2066.93,1140.43) 2098.58,1172.09 ; R52.1@2066.93,1192.91 2077.76,1192.91 v2(2116.14,1154.53) 2116.14,1052.17 2165.35,1002.95 C68.1@2165.35,992.13 C69.2@2165.35,933.07 2165.35,827.76 v3(2083.66,746.06) ; L8.2@2066.93,1350.39 2098.42,1350.39 2126.97,1321.85 v2(2126.97,1295.28) ; v3@2083.66,761.06 ccw(c2083.66,797.28) 2109.27,771.67 ccw(c2134.87,746.06) v3@2098.66,746.06 ; C68.1@2158.78,1009.52 cw(c2147.29,998.03) C68.1@2163.54,998.03
  Top Layer w23.62: 6844.93,1887.36 ccw(c6881.89,1924.32) U3.1@6881.89,1872.05 ; U3.3@6890.75,1946.85 6856.3,1946.85 6842.52,1933.07 6842.52,1889.76 6860.24,1872.05 U3.1@6890.75,1872.05 C38.2@6974.41,1872.05 ; 6960.15,1872.05 ccw(c6960.15,1892.21) C38.2@6974.41,1877.95
  Top Layer w27.56: C38.2@6974.41,1872.05 C38.2@6980.31,1877.95
  Top Layer w30: R12.1@186.01,488.19 v3(186.01,535.45) ; v2(549.23,535.45) v3@897.65,535.45 ; 855.44,535.45 ccw(c855.44,603.22) v3@903.36,555.3 ; J4.5@865.95,230.51 ccw(c827.47,268.99) 881.89,268.99 ; J4.5@872.05,224.41 881.89,234.25 C10.1@881.89,299.21 C9.1@881.89,362.2 881.89,519.69 v3@897.65,535.45 ; v3(910.43,548.23) v3@897.65,535.45 ; v1(1822.83,547.23) C70.1@1901.57,547.23 C71.2@1968.5,547.23 ; C5.1@6951.76,296.5 cw(c6951.76,263.76) 6974.9,286.91 ; 6965.56,296.26 cw(c6893.71,224.41) J2.2@6995.31,224.41 ; v3(6993.11,487.2) 6951.76,445.85 C4.1@6951.76,362.2 C5.1@6951.76,299.21 6962.6,299.21 7003.94,257.87 J2.2@7003.94,224.41 ; v3(7265.75,488.19) R23.1@7307.09,488.19
  Top Layer w47.24: C46.1@1877.95,1799.21 C47.1@2114.17,1799.21 2337.6,1799.21 2455.71,1681.1 v5(2972.44,1681.1) ; C46.1@1905.89,1781.12 cw(c1949.58,1737.43) 1949.58,1799.21 cw(c1949.58,1860.99) C46.1@1905.89,1817.31 ; C47.1@2086.24,1781.12 ccw(c2042.55,1737.43) 2042.55,1799.21 ccw(c2042.55,1860.99) C47.1@2086.24,1817.31 ; C47.1@2142.11,1781.12 cw(c2185.8,1737.43) 2185.8,1799.21 cw(c2185.8,1860.99) C47.1@2142.11,1817.31 ; 2496.84,1681.1 ccw(c2496.84,1719.7) v5@2524.13,1692.41 ; v5@2540.83,1692.41 ccw(c2568.12,1719.7) 2568.12,1681.1 ; v5(3256.89,1682.09) 6306.1,1682.09 F2.1@6444.88,1820.87 6444.88,1763.78 6553.15,1655.51 6886.81,1655.51 7109.25,1877.95 ; 6364.23,1740.22 ccw(c6283.58,1820.87) F2.1@6397.64,1820.87 ; C38.2@6980.31,1877.95 7109.25,1877.95 ; 7033.64,1802.34 ccw(c6958.03,1877.95) C37.1@7064.96,1877.95 ; C37.1@7061.15,1866.77 ccw(c7076.23,1910.98) 7109.25,1877.95 ; U2.4@7201.75,1413.12 7090.81,1413.12 7047.24,1456.69 7047.24,1519.69 7106.3,1578.74 7503.94,1578.74 L3.2@7610.24,1472.44 7610.24,1759.84 C32.1@7578.74,1791.34 C33.1@7366.14,1791.34 7279.53,1877.95 C34.2@7145.67,1877.95 7109.25,1877.95 ; 7305.65,1851.83 cw(c7245.17,1791.34) C33.1@7330.71,1791.34 ; C33.1@7394.08,1773.24 cw(c7437.77,1729.56) 7437.77,1791.34 cw(c7437.77,1853.12) C33.1@7394.08,1809.43 ; 7532.95,1549.73 cw(c7455.66,1472.44) L3.2@7564.96,1472.44 ; C32.1@7550.8,1773.24 ccw(c7507.12,1729.56) 7507.12,1791.34 ccw(c7507.12,1853.12) C32.1@7550.8,1809.43 ; C32.1@7570.49,1773.24 cw(c7474.53,1677.28) 7610.24,1677.28 ; L3.2@7592.14,1490.54 ccw(c7548.45,1534.22) 7610.24,1534.22 ccw(c7672.02,1534.22) L3.2@7628.33,1490.54
  Bottom Layer w20: v1(1822.83,547.23) 1800.2,569.87 1800.2,705.71 1842.52,748.03 ; v2@2114.37,1156.3 ccw(c2083.97,1186.7) 2126.97,1186.7 ; v2(2116.14,1154.53) 2126.97,1165.35 v2(2126.97,1295.28)
  Bottom Layer w30: v3(186.01,535.45) v2(549.23,535.45)
  Bottom Layer w47.24: v5(714.57,764.76) 731.3,748.03 1010.83,748.03 ; v5@722.92,773.12 ccw(c783.48,833.67) 783.48,748.03 ; v3(910.43,548.23) 953.74,591.54 953.74,690.94 1010.83,748.03 ; v5(2532.48,1684.06) 2469.49,1621.06 2469.49,821.85 2395.67,748.03 1842.52,748.03 1010.83,748.03 ; v5@2972.44,1682.09 v5(3256.89,1682.09) ; v3(6993.11,487.2) 7624.02,487.2 7716.54,579.72 7716.54,1729.33 7566.93,1878.94 v3(7210.63,1878.94)
+12V: C27.1 C28.1 C29.1 C30.1 C31.1 Q1.5 Q1.6 Q1.7 Q1.8 R45.1 U2.1 | length 1630.5
  Top Layer w47.24: R45.1@6273.62,1500.32 6397.32,1500.32 6519.69,1377.95 6519.69,1070.87 ; 6594.17,996.38 ccw(c6666.56,1068.77) C27.1@6672.48,966.57 ; C27.1@6653.14,970.09 ccw(c6609.45,926.4) 6609.45,988.18 ccw(c6609.45,1049.96) C27.1@6653.14,1006.28 ; C27.1@6669.75,1013.73 cw(c6658.41,1209.58) 6519.69,1070.86 ; C27.1@6681.07,988.18 6602.37,988.18 6519.69,1070.87 ; U2.1@7201.75,1213.12 7282.94,1213.12 7385.83,1110.24 C31.1@7385.83,944.88 ; U2.1@7236.75,1211.75 cw(c7236.75,1096.91) 7317.95,1178.11
AD1: R16.2 U1.10 | length 2541.6
  Top Layer w10: U1.10@726.38,1982.28 764.76,1982.28 773.62,1991.14 773.62,2056.1 v1(764.76,2064.96) ; v1@761.23,2061.43 cw(c731.31,2031.5) 773.62,2031.5 ; v1@764.76,2059.96 cw(c764.76,2047.89) 773.3,2056.43 cw(c781.83,2064.96) v1@769.76,2064.96 ; v1@768.3,2068.5 cw(c755.45,2055.65) 773.62,2055.65
  Top Layer w12: v1(215.55,2079.72) 86.21,1950.39 86.21,787.8 R16.2@385.83,488.19 ; 365.83,508.19 cw(c345.82,488.19) R16.2@374.11,488.19
  Bottom Layer w12: v1(215.55,2079.72) 750,2079.72 v1(764.76,2064.96)
AD2: R18.2 U1.11 | length 2349.4
  Top Layer w10: v1(541.34,2001.97) U1.11@726.38,2001.97 ; v1@544.87,1998.43 cw(c553.41,1989.9) 553.41,2001.97 cw(c553.41,2014.04) v1@544.87,2005.5
  Top Layer w12: v1(227.36,2051.18) 113.19,1937.01 113.19,827.76 R18.2@452.76,488.19 ; 432.75,508.19 cw(c412.75,488.19) R18.2@441.04,488.19
  Bottom Layer w10: v1(227.36,2051.18) 492.13,2051.18 v1(541.34,2001.97) ; v1@230.9,2047.65 cw(c239.43,2039.11) 239.43,2051.18 cw(c239.43,2063.25) v1@230.9,2054.72 ; v1@536.34,2001.97 ccw(c524.27,2001.97) 532.8,2010.5 ccw(c541.34,2019.04) v1@541.34,2006.97
AD3: R26.2 U1.12 | length 8262.9
  Top Layer w10: U1.12@726.38,2021.65 740.16,2035.43 740.16,2165.21 v1@798.38,2223.43 ; 787.73,2212.78 cw(c799.25,2201.25) v1@799.25,2217.55
  Top Layer w12: v1@798.38,2223.43 v1(799.25,2222.55) ; v2@7476.38,571.26 cw(c7476.38,555.56) 7487.47,566.66 cw(c7498.57,577.76) v2@7482.88,577.76 ; v2(7476.38,577.76) 7500,554.13 R26.2@7500,488.19 ; R26.2@7494.5,493.69 ccw(c7481.22,506.97) 7500,506.97 ccw(c7518.78,506.97) R26.2@7505.5,493.69
  Bottom Layer w12: v1(799.25,2222.55) 799.82,2221.98 1985.63,2221.98 2278.71,1928.91 2614.37,1928.91 2728.12,1815.16 2728.12,1010.04 2836.06,902.1 7152.03,902.1 v2(7476.38,577.76) ; v1@802.08,2225.38 ccw(c810.27,2233.57) 810.27,2221.98 ; v2@7469.88,577.76 ccw(c7454.19,577.76) 7465.28,588.85 ccw(c7476.38,599.95) v2@7476.38,584.26
AD4: R29.2 U1.13 | length 8342.9
  Top Layer w10: U1.13@667.32,2080.71 692.91,2080.71 714.57,2102.36 714.57,2197.83 v1(762.72,2245.98) ; v1@757.72,2245.98 cw(c745.65,2245.98) 754.18,2237.45 cw(c762.72,2228.91) v1@762.72,2240.98
  Top Layer w12: v2@7475.39,629.92 7566.93,538.39 R29.2@7566.93,488.19 ; v2@7482.88,630.91 ccw(c7503.32,630.91) 7488.87,616.45 ; R29.2@7561.43,493.69 ccw(c7548.15,506.97) 7566.93,506.97 ccw(c7585.71,506.97) R29.2@7572.43,493.69
  Bottom Layer w12: v1(762.72,2245.98) 1995.57,2245.98 2288.65,1952.91 2624.31,1952.91 2752.12,1825.1 2752.12,1019.98 2846,926.1 7181.18,926.1 v2(7476.38,630.91) ; v2@7469.88,630.91 ccw(c7454.19,630.91) 7465.28,642 ccw(c7476.38,653.1) v2@7476.38,637.41
AD_KEY1: R1.1 U1.14 | length 7377.8
  Top Layer w10: U1.14@647.64,2080.71 647.64,2115.16 659.45,2126.97 v1(685.04,2126.97) ; v1@681.5,2123.43 ccw(c672.97,2114.9) 672.97,2126.97 ccw(c672.97,2139.04) v1@681.5,2130.5
  Top Layer w12: v2@6600.39,474.8 cw(c6600.39,459.11) 6611.49,470.2 cw(c6622.59,481.3) v2@6606.89,481.3 ; v2(6600.39,481.3) 6619.11,462.58 R1.1@6619.11,362.2 ; R1.1@6613.61,371.64 ccw(c6600.33,384.92) 6619.11,384.92 ccw(c6637.89,384.92) R1.1@6624.61,371.64
  Bottom Layer w12: v1@687.01,2125.98 1945.87,2125.98 2238.94,1832.91 2574.61,1832.91 2632.12,1775.39 2632.12,970.28 2796.29,806.1 6275.59,806.1 v2(6600.39,481.3) ; v1@687.87,2129.8 ccw(c697.07,2139) 697.07,2125.98 ; v2@6593.89,481.3 ccw(c6578.2,481.3) 6589.3,492.4 ccw(c6600.39,503.49) v2@6600.39,487.8
AD_KEY2: R6.1 U1.15 | length 2969.6
  Top Layer w12: v1@218.5,1750 218.5,951.77 577.76,592.52 1177.17,592.52 1231.31,538.37 R6.1@1231.31,362.2 ; v1(627.95,2026.57) U1.15@627.95,2080.71 ; R6.1@1225.81,371.64 ccw(c1212.53,384.92) 1231.31,384.92 ccw(c1250.1,384.92) R6.1@1236.82,371.64
  Bottom Layer w12: v1(218.5,1750.98) 183.07,1786.42 183.07,1931.1 243.11,1991.14 498.03,1991.14 514.76,1974.41 586.61,1974.41 627.95,2015.75 v1(627.95,2026.57) ; 613.47,2001.26 ccw(c588.16,2026.57) v1@623.95,2026.57
AD_POW: R46.1 U1.17 | length 6068.6
  Top Layer w10: U1.17@588.58,2080.71 588.58,2187.99 v1(624.02,2223.43) ; v1@619.02,2223.43 cw(c606.94,2223.43) 615.48,2214.89 cw(c624.02,2206.35) v1@624.02,2218.43
  Top Layer w12: v2(5859.25,1500.32) R46.1@5923.23,1500.32 ; v2@5863.85,1495.72 cw(c5874.94,1484.63) 5874.94,1500.32 cw(c5874.94,1516.01) v2@5863.85,1504.92 ; R46.1@5913.79,1494.82 ccw(c5900.51,1481.54) 5900.51,1500.32 ccw(c5900.51,1519.1) R46.1@5913.79,1505.82
  Bottom Layer w12: v1(624.02,2223.43) 718.57,2317.98 2025.39,2317.98 2318.47,2024.91 2654.13,2024.91 2824.12,1854.92 2824.12,1622.05 2945.84,1500.32 v2(5859.25,1500.32) ; v2@5854.66,1495.72 ccw(c5843.56,1484.63) 5843.56,1500.32 ccw(c5843.56,1516.01) v2@5854.66,1504.92